# EAGLE board PMW3360-breakout_02 v31 (EAGLE 9.7.0)
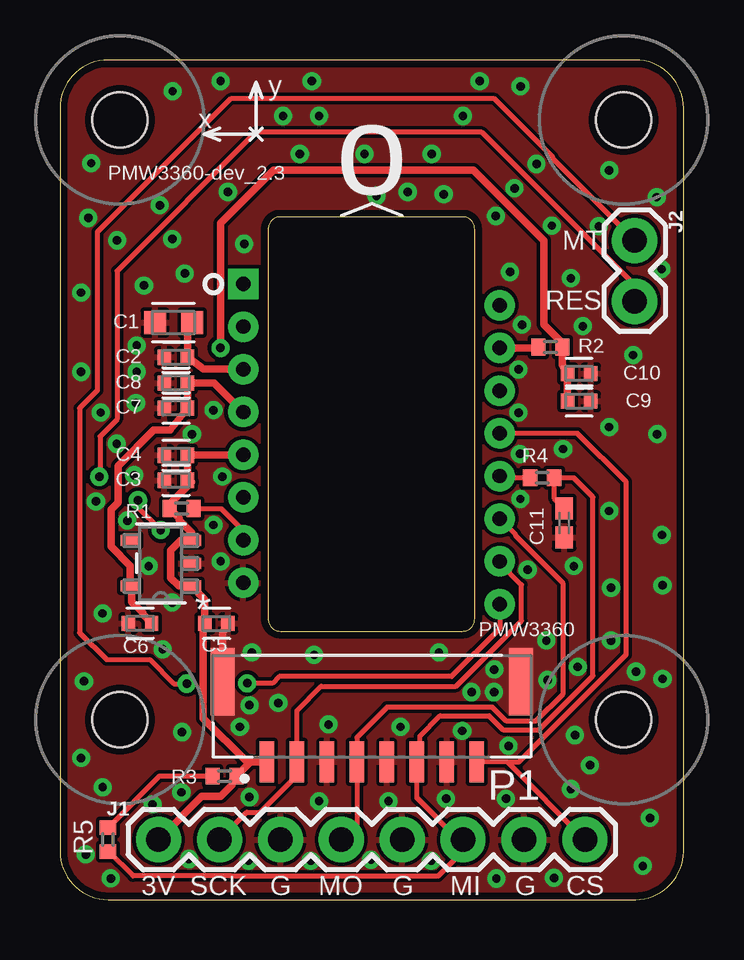
[diagram p0: board, top side]
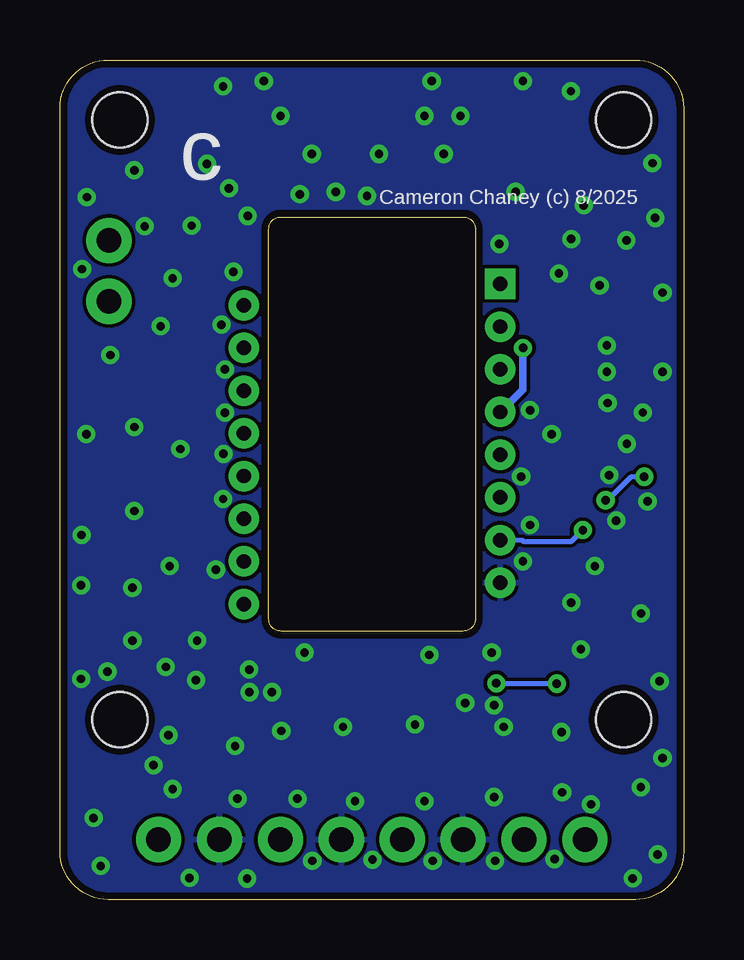
[diagram p1: board, bottom side, seen from below]

Size 26 x 35 mm. Coordinates in mm from the lower left corner, seen from the top.
Outline: 26,2 26,33 arc90 24,35 2,35 arc90 0,33 0,2 arc90 2,0 24,0 arc90 26,2
Copper layers (1*16): Top 0.035mm / dielectric 1.5mm / Bottom 0.035mm
Design rules "Fusion Electronics Design Rules *": minimum track width 6mil, minimum drill 0.35mm, track to track 6mil, track to pad 6mil, pad to pad 6mil, via to via 6mil, smd to smd 0mil, copper to edge 0.3mm, drill to drill 0.15mm, minimum pad ring 10mil, minimum via ring 8mil, stop-mask expansion 4mil, vias tented up to drill 0.4mm, thermal gap 0.15mm
Holes 2.3 mm at 2.5,7.5 23.5,7.5 23.5,32.5 2.5,32.5

## Footprints (pad centres in the part's own frame; a part is rotated, then mirrored left to right if it is on the bottom)
CAPC1608X85 = smd 0.921 x 0.97: 1 -0.775,0; 2 0.775,0
CAPC1005X60 = smd 0.56 x 0.629: 1 -0.485,0; 2 0.485,0
C0402K = smd 0.925 x 0.74: 1 -0.6,0; 2 0.6,0
1X08 = drill 1.016 pad 1.88: 1 0,0; 2 2.54,0; 3 5.08,0; 4 7.62,0; 5 10.16,0; 6 12.7,0; 7 15.24,0; 8 17.78,0
1X02 = drill 1.016 pad 1.88: 1 0,0; 2 2.54,0
JST_BM08B-GHS-TBT(LF)(SN)(N) = smd 0.6 x 1.7: 1 4.375,0; 2 3.125,0; 3 1.875,0; 4 0.625,0; 5 -0.625,0; 6 -1.875,0; 7 -3.125,0; 8 -4.375,0 | smd 1 x 2.8: P1 -6.225,-3.35; P2 6.225,-3.35
PMW3360 = drill 0.6 pad 1.27 square: 1 -5.359,5.664 | drill 0.6 pad 1.27: 2 -5.359,3.884; 3 -5.359,2.104; 4 -5.359,0.324; 5 -5.359,-1.456; 6 -5.359,-3.236; 7 -5.359,-5.016; 8 -5.359,-6.796; 9 5.334,-7.685; 10 5.334,-5.905; 11 5.334,-4.125; 12 5.334,-2.345; 13 5.334,-0.565; 14 5.334,1.215; 15 5.334,2.995; 16 5.334,4.775
R0402 = smd 0.6 x 0.7: 1 -0.5,0; 2 0.5,0
DDC5-L = smd 0.8 x 0.457: 1 -1.276,0.95; 2 -1.276,0; 3 -1.276,-0.95; 4 1.276,-0.95; 5 1.276,0.95

## Placement (x,y rotation side)
C1  4.7uF/10V  [CAPC1608X85]  4.74,24.06 180 top
C2  100nF  [CAPC1005X60]  4.84,22.61 180 top
C3  10uF  [CAPC1005X60]  4.84,17.48 180 top
C4  100nF  [CAPC1005X60]  4.84,18.52 180 top
C5  1uF  [CAPC1005X60]  6.52,11.51 0 top
C6  1uF  [CAPC1005X60]  3.34,11.52 180 top
C7  10uF  [CAPC1005X60]  4.84,20.49 180 top
C8  100nF  [CAPC1005X60]  4.84,21.54 180 top
C9  10uF  [CAPC1005X60]  21.65,20.78 0 top
C10  100nF  [CAPC1005X60]  21.64,21.93 0 top
C11  100pF  [C0402K]  21.02,15.7 270 top  (not fitted)
J1  [1X08]  4.11,2.5 0 top
J2  [1X02]  23.96,27.48 270 top
P1  BM08B-GHS-TBT(LF)(SN)(N)  [JST_BM08B-GHS-TBT(LF)(SN)(N)]  13,5.73 180 top
PMW3360  PMW3360PMW3360-LM19  [PMW3360]  13,20 0 top
R1  10k  [R0402]  5.07,16.3 0 top
R2  39  [R0402]  20.45,23.03 0 top
R3  10k  [R0402]  6.86,5.15 0 top
R4  100  [R0402]  20.1,17.58 0 top
R5  0R  [R0402]  2,2.5 90 top
U2  TLV70019DDCRDDC5-L  [DDC5-L]  4.21,14.02 180 top

## Library data of the parts
C1-C10 = Capacitor; CATEGORY: Capacitor
C11 = rcl; SPICEPREFIX: C
J1 = SparkFun-Connectors; PROD_ID: CONN-08438
J2 = SparkFun-Connectors
P1 = BM08B-GHS-TBT_LF__SN__N_; AVAILABILITY: In Stock; CHECK_PRICES: https://www.snapeda.com/parts/BM08B-GHS-TBT(LF)(SN)(N)/JST+Sales+America+Inc./view-part/?ref=eda; DESCRIPTION: Connector Header Surface Mount 8 position 0.049 (1.25mm); MF: JST Sales; MP: BM08B-GHS-TBT(LF)(SN)(N); PACKAGE: None; PRICE: None; SNAPEDA_LINK: https://www.snapeda.com/parts/BM08B-GHS-TBT(LF)(SN)(N)/JST+Sales+America+Inc./view-part/?ref=snap
PMW3360 = PMW3360
R1-R5 = rcl; SPICEPREFIX: R
U2 = TLV70019DDCR; COPYRIGHT: Copyright (C) 2024 Ultra Librarian. All rights reserved.; MANUFACTURER_PART_NUMBER: TLV70019DDCR; MFR_NAME: Texas Instruments

## Nets
+3V3: C3.1 C4.1 C5.1 J1.1 P1.1 PMW3360.5 R1.1 R3.2 U2.1 U2.3
GND: C1.2 C2.2 C3.2 C4.2 C5.2 C6.2 C7.2 C8.2 C9.2 C10.2 C11.2 J1.3 J1.5 J1.7 P1.3 P1.5 P1.7 P1.P1 P1.P2 PMW3360.8 U2.2
MISO: C11.1 J1.6 P1.6 R4.2 R5.1
MOSI: J1.4 P1.4 PMW3360.11
MOT: J2.1 PMW3360.9
N$1: PMW3360.15 R2.1
N$2: C1.1 C2.1 PMW3360.3
N$3: PMW3360.12 R4.1
N$4: R3.1 R5.2
NCS: J1.8 P1.8 PMW3360.13
NRES: J2.2 PMW3360.7 R1.2
SCK: J1.2 P1.2 PMW3360.10
VDD: C6.1 C7.1 C8.1 C9.1 C10.1 PMW3360.4 R2.2 U2.5

## Tracks (layer width: path | path; a pad name or v marks a point on that pad's centre or on a via)
+3V3
  Top 0.305: PMW3360.5 7.62,18.52 C4.1 C3.1 5.49,17.41 4.57,16.5 R1.1 4.97,15.9 4.97,15.82 5.48,15.3 U2.3 5.03,14.96 4.62,14.56 4.62,13.41 4.97,13.07 U2.1 6.04,12.51 C5.1 5.97,11.41 5.97,7.56 7.79,5.73 P1.1 7.95,5.73 R3.2 7.17,4.96 7.17,4.77 6.69,4.29 5.91,4.29 J1.1
GND  (via drill 0.35)
  Top 0.305: C5.2 6.78,11.11 P1.P2
  other vias: 6.77,17.63 19.2,33.9 21.3,4.61 18.76,26.16 21.43,13.9 5.09,6.98 10.5,34.12 11.2,7.3 14.2,7.2 18.7,6.4 16.1,4.2 18.6,4.2 13.7,4.1 10.8,4.1 1,9.1 0.88,5.9 2.12,0.88 5.38,1.69 18.2,0.88 20.6,0.9 24.3,1.4 24.6,3.4 22.1,5.6 22.9,16.2 25.12,9.2 25.12,13.1 25.1,15.2 24.9,19.4 23.9,22.7 21.3,25.9 7,29.5 4.68,27.53 5.2,26.1 1.3,30.7 4.7,33.7 6.7,34.12 17.5,34.12 22.9,30.4 3.2,22 3.2,23.1 3.5,25.6 3.7,13.9 6.7,14.1 1.5,16.6 5.5,19.4 3.17,20.7 0.88,25.3 0.88,22 1.7,20.3 22.9,19.7 21.8,23.9 7.68,27.33 18.17,28.5 18.95,29.65 19.87,30.67 1.18,28.42 16.8,32.67 10.8,32.67 9.3,32.67 4.16,28.94 15.5,31.08 12.7,31.08 10,31.08 20.51,28.09 13.2,29.34 16,29.4 14.5,29.5 8,10.3 7.9,8.1 19.12,20.3 19.2,16.7 20.98,18.78 6.4,15.61 21.47,6.85 9.1,8.2 1.78,11.93 4.28,10.43 19.26,23.96 19.18,18.58 15.8,10.3 10.6,10.2 2.38,27.48 24.88,29.28 4.68,12.38 1.08,1.88 25.08,26.28 22.98,10.8 22.98,13 19.5,13.75 20.33,9.15 18.11,9.59 10.46,1.62 12.97,1.66 16.77,7.03 20.28,10.8 7.86,1.62 15.48,1.62 17.16,8.64 3.86,3.97 1.78,4.68 7.9,4.27 22.47,28.07 18.1,8.64 7.5,7.2 19.12,22.1 21.59,9.7 24.02,9.5 2.81,15.8 3.1,17.69 2.37,19 5.06,4.47 6.4,20.4
  pour Top: -9.78,-7.86 33.24,-7.86 33.24,38.97 -9.78,38.97
  pour Bottom: -7.24,-5.32 31.97,-5.32 31.97,37.7 -7.24,37.7
MISO
  Top 0.2: C11.1 20.6,16.72 R4.2 21.42,17.58 22.22,16.78 22.22,9.32 19.98,7.08 18.47,7.08 17.89,7.66 15.85,7.66 15,6.81 15,5.86 P1.6 14.88,4.23 16.61,2.5 J1.6 16.81,2.02 15.78,0.98 7.15,0.98 3.04,0.98 2.03,2 R5.1
MOSI
  Top 0.2: J1.4 12.38,3.14 P1.4 12.38,6.76 13.63,8.01 18.04,8.01 18.62,7.43 19.83,7.43 20.96,8.56 20.96,13.2 18.99,15.17 18.99,15.22 PMW3360.11
MOT  (via drill 0.35)
  Top 0.203: J2.1 20.55,30.89 20.55,30.95 18.12,33.38 7.12,33.38 1.56,27.83 1.56,21.23 0.82,20.48 0.82,11.12 1.94,10 3.75,10 4.75,9 v5.29,9 | PMW3360.9 18.33,11.3 16.33,9.3 9.14,9.3 8.86,9.01 v7.81,9.01
  Bottom 0.203: v5.29,9 7.74,9
  Bottom 0.305: 7.74,9 7.75,9.01 v7.81,9.01
N$1
  Top 0.305: R2.1 19.91,23 PMW3360.15
N$2
  Top 0.305: C1.1 5.32,23.75 C2.1 5.99,22.1 PMW3360.3
N$3
  Top 0.2: R4.1 18.41,17.58 PMW3360.12
N$4
  Top 0.2: R5.2 4.15,5.15 R3.1
NCS
  Top 0.2: J1.8 18.66,5.73 | 18.66,5.73 P1.8 | PMW3360.13 21.58,19.43 23.61,17.41 23.61,10.21 19.13,5.73 18.66,5.73
NRES  (via drill 0.35)
  Top 0.203: R1.2 6.73,16.3 7.64,15.38 PMW3360.7 | J2.2 23.96,25.61 17.59,31.98 8.17,31.98 2.38,26.2 2.38,20.02 1.67,19.3 1.67,17.66 v1.64,17.63 | v4.2,15.4 3.25,16.35 v3.25,16.65
  Bottom 0.203: v4.2,15.4 4.67,14.93 6.68,14.93 6.74,14.98 PMW3360.7 | v3.25,16.65 3.15,16.65 2.17,17.63 v1.64,17.63
SCK
  Top 0.2: PMW3360.10 18.33,14.02 19.24,13.12 19.24,11.62 16.51,8.89 10.89,8.89 9.88,7.88 P1.2 9.88,5.18 8.34,3.64 7.79,3.64 J1.2
VDD  (via drill 0.35)
  Top 0.305: PMW3360.4 6.43,21.54 C8.1 C7.1 4.59,19.58 3.91,19.58 2.42,18.08 2.42,16.55 2.13,16.26 2.13,14.71 2.93,13.91 U2.5 3,13.07 3,12.4 3.44,11.96 3.44,11.9 C6.1 | C9.1 21.16,21.87 C10.1 20.95,22.29 R2.2 20.95,23.19 20.18,23.96 20.18,27.46 17.24,30.4 8.9,30.4 6.7,28.2 v6.7,23
  Bottom 0.305: v6.7,23 v6.7,22.99 6.7,21.26 PMW3360.4

## Text on the board
tPlace: y | x | o | PMW3360-dev_2.3 | MT | RES | 3V | SCK | G | MO | G | MI | G | CS
bPlace: Cameron Chaney (c) 8/2025 | c